# Allegro board STM32F103C8T6_KIT_DEV.brd
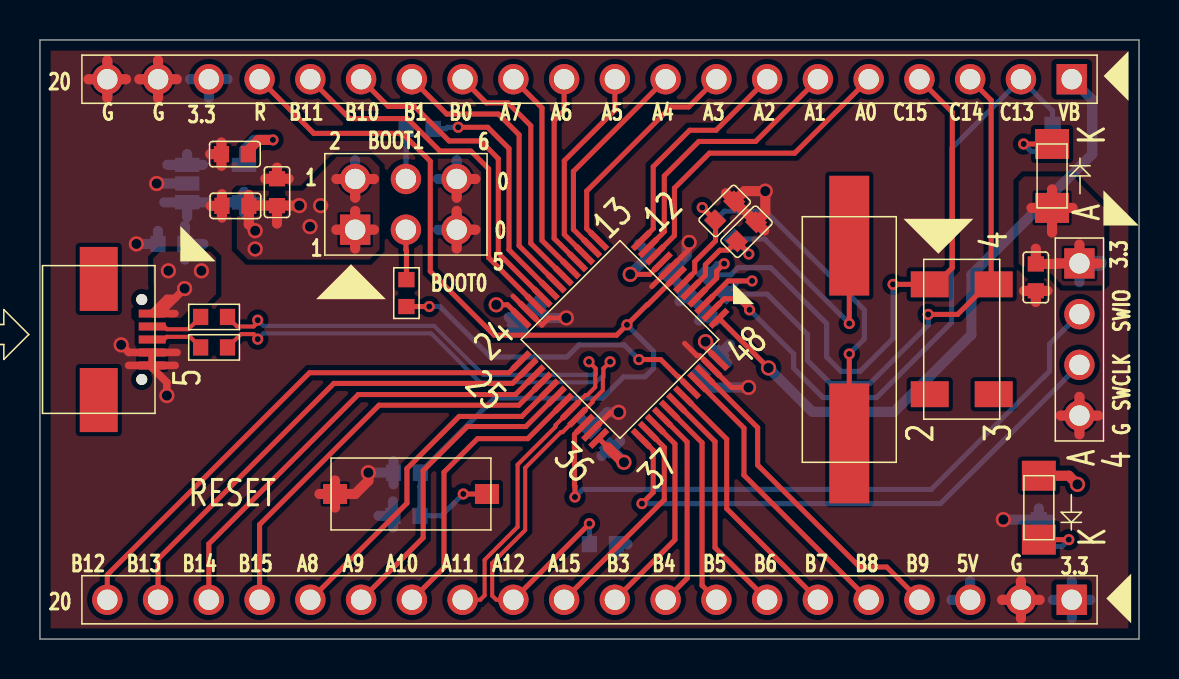
[diagram p0: board, top side]
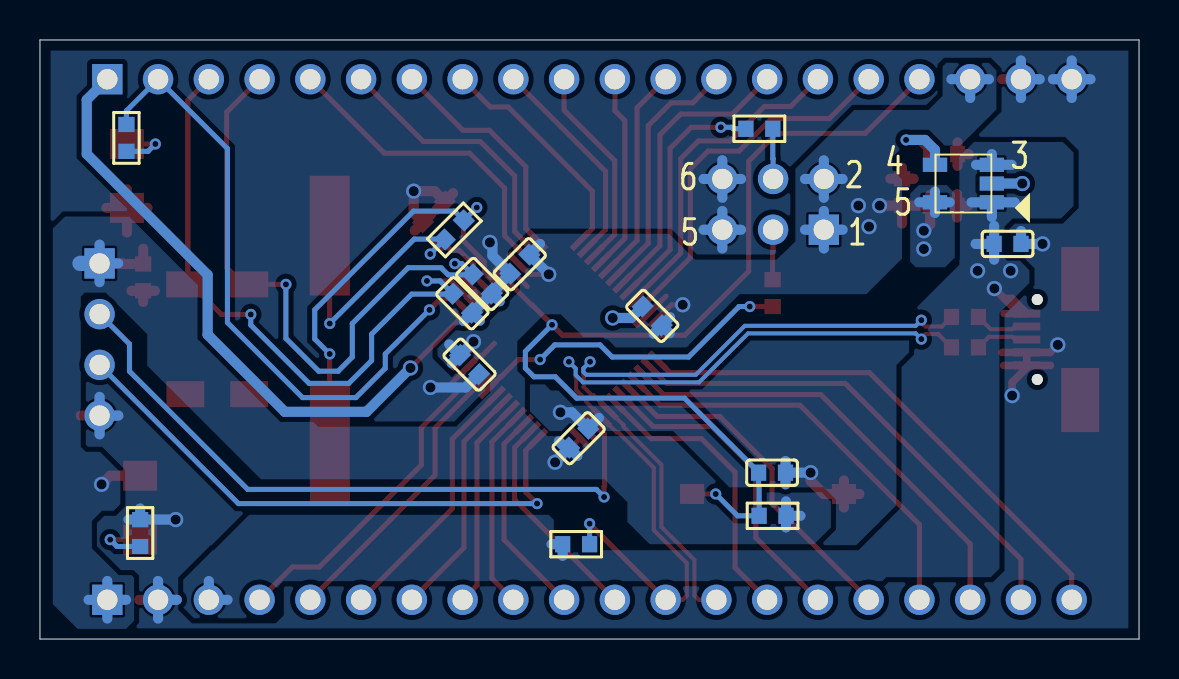
[diagram p1: board, bottom side, seen from below]

Outline 55 x 30 mm; copper layers: TOP, BOTTOM. Coordinates in mm from the lower left corner of the outline.
Outline path: 0,30 0,0 55,0 55,30 0,30

## Design rules (mm)
constraint set DEFAULT: min track width 0.127
net group USB_1: nets N07691 N07695
net group USB_2: nets PA11 PA12
net group PWR: nets VBAT
net group SIGNAL: nets BOOT0 BOOT1 N02981 N03013 N03359 N03363 N05848 OSCIN OSCOUT PA0 PA1 PA2 PA3 PA4 PA5 PA6 PA7 PA8 PA9 PA10 PA15 PB0 PB1 PB3 PB4 PB5 PB6 PB7 PB8 PB9 PB10 PB11 PB12 PB13 PB14 PB15 PC13 PC14 PC15 RESET SWCLK SWIO

## Placement (name value [footprint] x y rotation side)
C1  105  [C0603]  18.36 8.33 180 bottom
C2  104  [C0603]  49.83 18.11 270 top
C3  104  [C0603]  24.36 16.18 45 bottom
C4  104  [C0603]  30.99 18.77 315 bottom
C5  104  [C0603]  33.5 13.74 225 bottom
C6  104  [C0603]  28.04 10.06 135 bottom
C7  105  [C0603]  6.58 19.79 180 bottom
C8  106  [C0603]  9.78 21.69 180 top
C9  104  [C0603]  11.86 22.38 90 top
C10  223  [C0603]  9.75 24.28 180 top
C11  20p  [C0603]  32.87 17.78 45 bottom
C12  20p  [C0603]  33.86 16.81 45 bottom
C13  20p  [C0603]  35.36 20.4 225 top
C14  20p  [C0603]  34.26 21.44 225 top
D1  LED  [LED_1206_SMD_3_2X1_6MM]  49.99 6.58 90 top
D2  LED  [LED_1206_SMD_3_2X1_6MM]  50.65 23.19 270 top
J1  HEADER 3x2  [HEADER_3X2]  18.31 21.77 0 top
J2  HEADER 4x1  [HEADER_4X1]  52.02 15 0 top
J3  HEADER 20X1  [HEADER_20X1]  27.5 28.03 270 top
J4  HEADER 20X1  [HEADER_20X1]  27.5 1.97 270 top
NOREF  -  []  -81.69 -113.36 0 top
NOREF#2  -  []  55 0 90 top
NOREF#3  -  []  0 0 90 top
NOREF#4  -  []  55 32.54 90 top
NOREF#5  -  []  0 -10.16 90 top
NOREF#6  -  []  0 72.7 0 top
NOREF#7  -  []  0 30 0 top
R1  10K  [R0603]  18.34 6.17 0 bottom
R2  100K  [R0603]  18.34 17.32 90 top
R3  100K  [R0603]  19 25.55 0 bottom
R4  510R  [R0603]  49.99 5.31 90 bottom
R5  510R  [R0603]  50.67 25.1 90 bottom
R6  20R  [R0603]  8.71 16.13 0 top
R7  20R  [R0603]  8.71 14.61 0 top
R8  4.7K  [R0603]  28.17 4.75 0 bottom
R9  1M  [R0603]  34.26 20.49 135 bottom
SW1  SW PUSHBUTTON  [BUTTON_SMD_3X6MM]  18.57 7.26 0 top
U1  STM32F103xx  [LQFP48]  29.02 15 225 top
U2  RT9193  [SOT-23-5]  8.79 22.81 90 bottom
U3  USB-MICRO-2.0  [USB-MICRO-B-2_0]  2.94 15 270 top
Y1  32.768k  [MC306]  46.13 15.01 270 top
Y2  8MHz  [2PIN_SMD_HC49-S]  40.5 15 90 top

## Library data of the parts
C1-C14 = CAP NP
D1 D2 = LED
J1 = HEADER 3x2/SM
J2 = HEADER 4
J3 J4 = HEADER 20
R1-R9 = RESISTOR
SW1 = SW PUSHBUTTON
U1 = STM32F103xx_2
U2 = RT9193
U3 = USB-MICRO-2.0
Y1 Y2 = CRYSTAL

## Footprints (pads in the part's own frame, mm; a bottom-side part is the same pattern mirrored in y, then rotated)
2PIN_SMD_HC49-S
  rect 6x2 smd: 1(-5.2,0) 2(5.2,0)
BUTTON_SMD_3X6MM
  rect 1.2x1 smd: 1(-3.8,0) 2(3.8,0)
C0603
  rect 0.762x0.813 smd: 1(-0.673,0) 2(0.673,0)
HEADER_3X2
  rect 1.52x1.52 hole 1.02: 1(-2.54,-1.27)
  round 1.52 hole 1.02: 2(-2.54,1.27) 3(0,-1.27) 4(0,1.27) 5(2.54,-1.27) 6(2.54,1.27)
HEADER_4X1
  rect 1.52x1.52 hole 1.02: 1(0,3.81)
  round 1.52 hole 1.02: 2(0,1.27) 3(0,-1.27) 4(0,-3.81)
HEADER_20X1
  rect 1.52x1.52 hole 1.02: 1(0,24.13)
  round 1.52 hole 1.02: 2(0,21.59) 3(0,19.05) 4(0,16.51) 5(0,13.97) 6(0,11.43) 7(0,8.89) 8(0,6.35) 9(0,3.81) 10(0,1.27) 11(0,-1.27) 12(0,-3.81) 13(0,-6.35) 14(0,-8.89) 15(0,-11.43) 16(0,-13.97) 17(0,-16.51) 18(0,-19.05) 19(0,-21.59) 20(0,-24.13)
LED_1206_SMD_3_2X1_6MM
  rect 1.5x1.7 smd: 1(-1.6,0) 2(1.6,0)
LQFP48
  rect 1.2x0.3 smd: 1(-4.25,2.75) 2(-4.25,2.25) 3(-4.25,1.75) 4(-4.25,1.25) 5(-4.25,0.75) 6(-4.25,0.25) 7(-4.25,-0.25) 8(-4.25,-0.75) 9(-4.25,-1.25) 10(-4.25,-1.75) 11(-4.25,-2.25) 12(-4.25,-2.75) 25(4.25,-2.75) 26(4.25,-2.25) 27(4.25,-1.75) 28(4.25,-1.25) 29(4.25,-0.75) 30(4.25,-0.25) 31(4.25,0.25) 32(4.25,0.75) 33(4.25,1.25) 34(4.25,1.75) 35(4.25,2.25) 36(4.25,2.75)
  rect 0.3x1.2 smd: 13(-2.75,-4.25) 14(-2.25,-4.25) 15(-1.75,-4.25) 16(-1.25,-4.25) 17(-0.75,-4.25) 18(-0.25,-4.25) 19(0.25,-4.25) 20(0.75,-4.25) 21(1.25,-4.25) 22(1.75,-4.25) 23(2.25,-4.25) 24(2.75,-4.25) 37(2.75,4.25) 38(2.25,4.25) 39(1.75,4.25) 40(1.25,4.25) 41(0.75,4.25) 42(0.25,4.25) 43(-0.25,4.25) 44(-0.75,4.25) 45(-1.25,4.25) 46(-1.75,4.25) 47(-2.25,4.25) 48(-2.75,4.25)
MC306
  rect 1.3x1.9 smd: (2.75,1.6) (2.75,-1.6) 1(-2.75,-1.6) 2(-2.75,1.6)
R0603
  rect 0.762x0.813 smd: 1(-0.673,0) 2(0.673,0)
SOT-23-5
  rect 0.711x1.219 smd: 1(-0.94,-1.422) 2(0,-1.422) 3(0.94,-1.422) 4(0.94,1.422) 5(-0.94,1.422)
USB-MICRO-B-2_0
  rect 3.205x1.9 smd: (-3.033,0) (3.033,0)
  round 0.551 hole 0.55 unplated: (-2,2.15) (2,2.15)
  rect 0.4x1.35 smd: 1(-1.3,2.675) 2(-0.65,2.675) 3(0,2.675) 4(0.65,2.675) 5(1.3,2.675)

## Nets
5V: C7.1 J4.3 R8.2 U2.1 U2.3 U3.1(VBUS)
GND: C1.2 C2.2 C3.2 C4.2 C5.2 C6.2 C7.2 C8.2 C9.2 C10.2 C11.1 C12.1 C13.1 C14.1 J1.5 J1.6 J2.4 J3.19 J3.20 J4.2 R4.2 SW1.1 U1.8 U1.23 U1.35 U1.47(VSS_3) U2.2 U3.4 U3.5
VBAT: J3.1 U1.1
VCC3V3: C2.1 C3.1 C4.1 C5.1 C6.1 C8.1 C9.1 D1.2 D2.2 J1.1 J1.2 J2.1 J3.18 J4.1 R1.1 U1.9 U1.24 U1.36 U1.48 U2.5(VOUT)
BOOT0: R2.1 U1.44
BOOT1: R3.2 U1.20
OSCIN: C13.2 R9.1 U1.5 Y2.2
OSCOUT: C14.2 R9.2 U1.6 Y2.1
PA0: J3.5 U1.10
PA1: J3.6 U1.11
PA2: J3.7 U1.12
PA3: J3.8 U1.13
PA4: J3.9 U1.14
PA5: J3.10 U1.15
PA6: J3.11 U1.16
PA7: J3.12 U1.17
PA8: J4.16 U1.29
PA9: J4.15 U1.30
PA10: J4.14 U1.31
PA11: J4.13 R6.2 U1.32
PA12: J4.12 R7.2 R8.1 U1.33
PA15: J4.11 U1.38
PB0: J3.13 U1.18
PB1: J3.14 U1.19
PB3: J4.10 U1.39
PB4: J4.9 U1.40
PB5: J4.8 U1.41
PB6: J4.7 U1.42
PB7: J4.6 U1.43
PB8: J4.5 U1.45
PB9: J4.4 U1.46
PB10: J3.15 U1.21
PB11: J3.16 U1.22
PB12: J4.20 U1.25
PB13: J4.19 U1.26
PB14: J4.18 U1.27
PB15: J4.17 U1.28
PC13: J3.2 R5.2 U1.2
PC14: C12.2 J3.3 U1.3 Y1.2
PC15: C11.2 J3.4 U1.4 Y1.1
RESET: C1.1 J3.17 R1.2 SW1.2 U1.7
SWCLK: J2.3 U1.37
SWIO: J2.2 U1.34
N02981: J1.3 R2.2
N03013: J1.4 R3.1
N03359: D1.1(CATHODE) R4.1
N03363: D2.1(CATHODE) R5.1
N05848: C10.1 U2.4
N07691: R6.1 U3.2
N07695: R7.1 U3.3

## Via types
v1: diameter 0.559, hole 0.305, TOP to BOTTOM, 24 vias
v2: diameter 0.762, hole 0.508, TOP to BOTTOM, 25 vias

## Routing (per net, layer and track width the routed paths; a pad name or vN(x,y) marks a point on that pad's centre or on a via; arc(x,y) is an arc through that point)
5V: length 15.2
  TOP w0.381: v2(7.24,17.55) 6.75,17.06 ; 6.75,17.06 5.99,16.3 ; 6.75,17.06 6.36,17.06 5.62,16.31 U3.1 5.99,16.3 ; 5.99,16.3 6.75,16.3
  BOTTOM w0.508: 46.55,2.9 J4.3 45.61,1.97 ; 29.4,4.75 R8.2 28.84,4.17 ; C7.1 7.25,19 ; C7.1 8.18,19.79 ; C7.1 7.25,20.69 ; 7.37,23.75 8.15,23.75 ; 7.37,23.75 7.37,24.28 ; 7.37,23.75 6.38,23.75 ; U2.1 6.22,21.87 ; U2.1 7.37,21.13 ; U2.1 8.38,21.87
  vias: v2(6.43,18.44) v2(8.08,18.44)
GND: length 99.8
  TOP w0.254: 23.67,17.17 U1.23 25.12,15.72 25.48,16.08 v2(26.34,16.08) ; v2(32.49,19.86) 32.49,19.52 U1.8 30.62,17.65 ; U1.35 28.56,11.35 v2(28.96,11.35) ; v2(35.46,12.6) 34.61,12.6 U1.47 33.02,14.19 32.88,14.19 32.26,14.81
  TOP w0.381: U3.4 4.45,14.35 v2(4.06,14.73) ; U3.4 U3.5 ; U3.4 6.86,14.35 ; U3.5 5.62,13.59 6.35,12.85 v2(6.35,12.19) ; U3.5 4.44,13.7 ; U3.5 6.77,13.7
  TOP w0.508: J2.4 52.02,12.13 ; J2.4 52.95,11.19 ; J2.4 51.08,11.19 ; J2.4 52.02,10.25 ; 8.55,21.69 C8.2 ; C8.2 9.11,22.28 ; C8.2 9.11,21.11 ; C14.1 35.26,22.43 v2(36.3,22.43) 36.3,21.34 C13.1 ; C14.1 34.33,22.33 ; C14.1 35.15,21.5 ; 13.99,7.26 SW1.1 ; SW1.1 14.77,6.59 ; SW1.1 15.77,7.26 16.43,7.92 v2(16.43,8.33) ; SW1.1 14.77,7.94 ; 20.85,19.56 J1.5 ; J1.5 21.79,20.5 ; J1.5 20.85,21.44 ; 5.91,27.1 J3.19 ; J3.19 6.85,28.03 ; J3.19 4.97,28.03 ; J3.19 5.91,28.97 ; C10.2 9.08,24.87 ; C10.2 9.08,23.7 ; C10.2 8.52,24.28 ; J4.2 49.09,2.9 ; J4.2 49.09,1.03 ; J4.2 48.15,1.97 ; J4.2 50.03,1.97 ; C2.2 50.42,17.44 ; C2.2 49.25,17.44 ; C2.2 49.83,16.88 ; 21.79,23.04 J1.6 20.85,22.1 ; 2.43,28.03 J3.20 ; J3.20 3.37,27.1 ; J3.20 3.37,28.97 ; J3.20 4.31,28.03 ; 11.28,23.05 C9.2 ; C9.2 12.45,23.05 ; C9.2 11.86,23.61 ; C13.1 36.25,20.46 ; C13.1 35.42,21.29
  BOTTOM w0.508: 17.69,7.75 C1.2 ; C1.2 17.69,8.92 ; C1.2 v2(16.43,8.33) ; 49.09,1.03 J4.2 ; J4.2 48.15,1.97 ; J4.2 49.09,2.9 ; 31.98,17.72 C11.1 ; C11.1 32,16.91 ; C11.1 32.39,17.37 C4.2 32.36,19.19 32.36,19.74 v2(32.49,19.86) ; C11.1 33.36,16.34 C12.1 ; 52.02,10.25 J2.4 ; J2.4 51.08,11.19 ; J2.4 52.02,12.13 ; 4.97,28.03 J3.19 ; J3.19 5.91,27.1 ; J3.19 5.91,28.97 ; J3.20 4.31,28.03 ; J3.20 3.37,27.1 ; J3.20 2.43,28.03 ; J3.20 3.37,28.97 ; U2.2 v2(5.84,22.81) ; J1.5 21.79,20.5 ; J1.5 20.85,19.56 ; J1.5 19.92,20.5 ; J1.5 20.85,21.44 ; R4.2 49.99,6.54 ; R4.2 50.57,5.98 ; R4.2 v2(48.21,5.98) ; v2(4.83,19.79) C7.2 5.91,20.43 ; 20.85,22.1 J1.6 ; J1.6 20.85,23.98 ; J1.6 21.79,23.04 ; J1.6 19.92,23.04 ; C12.1 33.8,15.93 ; C12.1 32.99,15.94 ; C12.1 32.97,16.75 ; 27.03,11.07 C6.2 28.39,11.35 v2(28.96,11.35) ; v2(26.34,16.08) 25.41,16.08 C3.2 ; v2(35.46,12.6) 33.69,12.6 C5.2
VBAT: length 31.9
  TOP w0.254: v2(36.46,13.57) U1.1
  BOTTOM w0.508: v2(36.46,13.57) 38.66,11.38 42.75,11.38 46.61,15.24 46.61,18.24 52.66,24.29 52.66,27 J3.1
VCC3V3: length 60.4
  TOP w0.254: v2(33.31,14.89) 33.31,14.61 U1.48 ; v2(22.83,16.74) 23.4,16.74 U1.24 ; v2(29.54,18.26) 30.52,18.26 U1.9 ; U1.36 28.41,9.6
  TOP w0.508: 49.83,19.55 C2.1 50.85,18.78 50.88,18.81 J2.1 ; C9.1 11.86,20.8 ; C9.1 10.46,21.7 C8.1 ; C9.1 v2(12.98,21.7) ; 15.77,19.56 J1.1 ; J1.1 16.71,20.5 ; J1.1 14.84,20.5 ; J1.1 15.77,21.44 ; 49.62,21.59 D2.2 ; D2.2 51.68,21.59 ; D2.2 50.65,20.36 ; D2.2 50.65,22.52 ; J2.1 52.95,18.81 ; J2.1 52.02,19.75 ; 28.41,9.6 29.16,8.85 v2(29.22,8.85) ; C8.1 10.45,22.24 ; C8.1 10.45,20.76 v2(10.77,20.45) ; v2(51.92,7.75) 51.49,8.18 D1.2 ; 14.84,23.04 J1.2 ; J1.2 15.77,22.1 ; J1.2 16.71,23.04
  BOTTOM w0.508: J1.2 16.71,23.04 ; J1.2 14.84,23.04 ; J1.2 15.77,22.1 ; J1.2 15.77,23.98 ; 28.1,9.17 C6.1 ; C6.1 29.22,8.88 v2(29.22,8.85) ; C6.1 28.71,9.58 29.03,9.91 ; 51.63,1.03 J4.1 ; J4.1 52.57,1.97 ; J4.1 50.69,1.97 ; J4.1 51.63,2.9 ; U2.5 10.21,22.4 ; U2.5 10.21,21.34 ; U2.5 11,21.87 ; U2.5 9.47,21.87 ; J2.1 52.02,19.75 ; J2.1 52.02,17.87 ; J2.1 51.08,18.81 ; 23.49,15.31 C3.1 ; C3.1 23.47,16.12 ; C3.1 24.3,15.29 ; 8.45,27.1 J3.18 ; J3.18 7.51,28.03 ; J3.18 9.39,28.03 ; 16.94,6.17 R1.1 ; R1.1 17.67,6.9 ; R1.1 17.67,5.59 ; 15.77,19.56 J1.1 ; J1.1 15.77,21.44 ; J1.1 16.71,20.5 ; J1.1 14.84,20.5 ; C5.1 33.99,14.22 34.39,13.82 ; C5.1 v2(33.31,14.89) ; C5.1 34.52,14.76 ; v2(29.54,18.26) 29.54,18.27 C4.1 29.97,19.79
  BOTTOM w0.762: J2.1 53,18.81
  vias: v2(10.77,19.53) v2(13.51,20.65) v2(14.05,21.7)
BOOT0: length 16.4
  TOP w0.254: v1(29.97,14) 31.06,14 31.93,13.13 31.96,13.13 U1.44 ; v1(19.48,16.65) R2.1
  BOTTOM w0.254: v1(29.97,14) 29.24,14.73 26.97,14.73 26.37,14.12 22.54,14.12 20.02,16.65 v1(19.48,16.65)
BOOT1: length 12.2
  TOP w0.254: U1.20 23.47,19.49 23.47,24.56 22.4,25.63 v1(20.93,25.63)
  BOTTOM w0.254: v1(20.93,25.63) 20.4,25.63 20.32,25.55 R3.2
OSCIN: length 17.5
  TOP w0.254: U1.5 33.3,18.21 33.3,18.75 34.03,19.47 34.43,19.47 C13.2 35.47,19.33 v1(35.47,19.28) ; Y2.2 v1(40.5,15.8)
  BOTTOM w0.254: v1(40.5,15.8) 36.27,20.03 34.76,20.03 R9.1 v1(35.47,19.28)
OSCOUT: length 22.3
  TOP w0.254: Y2.1 v1(40.5,14.27) ; v1(33.14,21.61) C14.2 33.81,20.94 33.81,19.94 32.77,18.9 32.77,18.39 32.21,17.83 U1.6
  BOTTOM w0.254: v1(33.14,21.61) C14.2 34.26,21.43 36.31,21.43 41.25,16.48 41.25,15.02 v1(40.5,14.27)
PA0: length 15.7
  TOP w0.254: J3.5 37.77,24.33 33.5,24.33 31.75,22.58 31.75,20.2 U1.10
PA1: length 13.6
  TOP w0.254: U1.11 31.24,20.4 31.24,23.19 32.97,24.92 35.81,24.92 J3.6
PA2: length 11.5
  TOP w0.254: U1.12 30.69,20.55 30.69,23.65 32.51,25.48 33.83,25.48 J3.7
PA3: length 11.5
  TOP w0.254: U1.13 27.36,20.55 27.36,22.43 31.57,26.64 32.46,26.64 J3.8
PA4: length 10.7
  TOP w0.254: J3.9 26.7,23.42 26.7,20.51 U1.14
PA5: length 10.3
  TOP w0.254: J3.10 28.77,26.48 26.24,23.95 26.24,20.26 U1.15
PA6: length 9.8
  TOP w0.254: J3.11 26.23,26.46 25.73,25.96 25.73,20.06 U1.16
PA7: length 10.7
  TOP w0.254: U1.17 25.12,19.96 25.12,26.6 J3.12
PA8: length 17.3
  TOP w0.254: J4.16 18.36,6.8 18.36,8.53 20.98,11.15 24.11,11.15 U1.29
PA9: length 16
  TOP w0.254: U1.30 24.31,10.64 21.39,10.64 19.18,8.43 19.18,5.07 J4.15
PA10: length 14.5
  TOP w0.254: U1.31 24.41,10.03 21.89,10.03 20.22,8.36 20.22,3.58 J4.14
PA11: length 36
  TOP w0.203: R6.2 9.86,15.65 10.69,15.65 10.9,15.86 v1(10.9,15.97) ; J4.13 22.03,1.97 22.25,2.18 22.25,3.96 23.9,5.61 23.9,8.73 25.8,10.63 25.8,10.71 U1.32 27.3,12.22 27.38,12.22 27.79,12.62 27.79,13.24 27.81,13.26 27.81,13.55 v1(27.47,13.89)
  BOTTOM w0.203: v1(27.47,13.89) 27.81,13.55 27.81,13.38 27.66,13.23 22.18,13.23 19.73,15.68 11.18,15.68 v1(10.9,15.97)
PA12: length 43.1
  TOP w0.203: R7.2 10.05,15.27 10.69,15.27 10.9,15.07 v1(10.9,15.02) ; v1(28.53,13.89) 28.19,13.55 28.19,13.1 28.17,13.08 28.17,12.46 27.65,11.95 27.65,11.86 U1.33 26.15,10.36 26.07,10.36 24.28,8.57 24.28,5.46 22.63,3.8 22.63,2.17 22.83,1.97 J4.12
  TOP w0.254: J4.12 27.5,5.77 v1(27.5,5.78)
  BOTTOM w0.203: v1(10.9,15.02) 11.18,15.3 19.57,15.3 22.02,12.85 27.82,12.85 28.19,13.23 28.19,13.55 v1(28.53,13.89)
  BOTTOM w0.254: R8.1 v1(27.5,5.78)
PA15: length 10.8
  TOP w0.254: J4.11 31.24,6.98 31.24,9.6 U1.38
PB0: length 12.6
  TOP w0.254: U1.18 24.56,19.82 24.56,25.7 23.42,26.85 22.34,26.85 J3.13
PB1: length 14.7
  TOP w0.254: J3.14 20.35,26.29 22.94,26.29 23.98,25.25 23.98,19.69 U1.19
PB3: length 10.4
  TOP w0.254: U1.39 31.78,9.77 31.78,4.97 J4.10
PB4: length 10.1
  TOP w0.254: J4.9 32.38,3.04 32.38,9.87 U1.40
PB5: length 10.5
  TOP w0.254: U1.41 33.13,9.83 33.13,2.68 J4.8
PB6: length 11.7
  TOP w0.254: J4.7 33.78,4.57 33.78,9.89 U1.42
PB7: length 13
  TOP w0.254: U1.43 34.37,10.01 34.37,6.53 J4.6
PB8: length 14.5
  TOP w0.254: J4.5 35.23,8.21 35.23,10.56 U1.45
PB9: length 16.5
  TOP w0.254: U1.46 35.92,10.58 35.92,8.71 41.02,3.61 42.37,3.61 J4.4
PB10: length 16.4
  TOP w0.254: J3.15 17.43,26.67 18.75,26.67 20.47,24.94 22.05,24.94 22.94,24.05 22.94,19.32 U1.21
PB11: length 18.5
  TOP w0.254: J3.16 15.5,26.06 18.39,26.06 20.02,24.43 21.56,24.43 22.45,23.55 22.45,19.1 U1.22
PB12: length 26.4
  TOP w0.254: J4.20 3.37,3.22 13.49,13.34 23.47,13.34 U1.25
PB13: length 24.5
  TOP w0.254: J4.19 5.91,4 14.71,12.8 23.64,12.8 U1.26
PB14: length 22.6
  TOP w0.254: U1.27 23.79,12.24 15.93,12.24 8.45,4.77 J4.18
PB15: length 20.9
  TOP w0.254: J4.17 10.99,5.73 16.97,11.71 23.97,11.71 U1.28
PC13: length 32.8
  TOP w0.254: U1.2 34.25,17.04 34.95,17.04 v1(35.51,16.48)
  BOTTOM w0.254: R5.2 50.67,26.45 J3.2 45.62,24.56 45.62,15.85 41.86,12.09 39.19,12.09 37.72,13.56 37.72,14.27 v1(35.51,16.48)
PC14: length 33.6
  TOP w0.254: J3.3 47.6,26.98 47.6,17.93 47.43,17.76 ; 47.43,17.76 45.92,16.26 v1(44.45,16.26) ; 47.43,17.76 Y1.2 ; U1.3 34.43,17.93 v1(35.64,17.93)
  BOTTOM w0.254: v1(35.64,17.93) 34.98,17.93 C12.2 34.35,17.27 36.4,17.27 38.4,15.27 38.4,13.94 39.55,12.8 41.53,12.8 44.45,15.72 v1(44.45,16.26)
PC15: length 32.8
  TOP w0.254: v1(42.69,17.76) Y1.1 44.83,17.76 45.66,18.59 45.66,26.39 J3.4 ; U1.4 33.86,18.07 33.86,18.42 v1(34.24,18.8)
  BOTTOM w0.254: v1(42.69,17.76) 42.69,15.06 41.05,13.41 40.08,13.41 39.37,14.12 39.37,15.8 36.58,18.59 34.93,18.59 34.57,18.24 33.36,18.24 C11.2 33.88,18.8 v1(34.24,18.8)
RESET: length 53.2
  TOP w0.254: SW1.2 v1(21.18,7.26) ; J3.17 13.7,25.32 18.14,25.32 19.53,23.93 19.53,18.41 22.73,15.21 28.85,15.21 v1(29.38,15.74) 30.37,16.73 30.41,16.73 U1.7
  BOTTOM w0.254: v1(21.18,7.26) 20.09,6.17 R1.2 19.01,7.65 19.04,7.67 C1.1 19.04,8.36 22.75,12.06 28.14,12.06 29.21,13.13 30.28,13.13 30.71,13.56 30.71,14.4 v1(29.38,15.74)
SWCLK: length 28.5
  TOP w0.254: U1.37 30.69,9.45 30.69,7.35 v1(30.12,6.78)
  BOTTOM w0.254: v1(30.12,6.78) 45.07,6.78 J2.3
SWIO: length 33.7
  TOP w0.254: U1.34 26.75,10.25 26.75,7.67 26.77,7.65 v1(26.77,7.11)
  BOTTOM w0.254: v1(26.77,7.11) 27.15,7.49 44.6,7.49 50.52,13.41 50.52,14.77 J2.2
N02981: length 2.5
  TOP w0.254: R2.2 18.34,19.46 18.31,19.48 J1.3
N03013: length 2.5
  BOTTOM w0.254: R3.1 18.33,24.06 18.31,24.05 J1.4
N03359: length 3.1
  TOP w0.254: D1.1 v1(51.49,4.98)
  BOTTOM w0.254: v1(51.49,4.98) 51.14,4.64 R4.1
N03363: length 3
  TOP w0.254: D2.1 v1(49.23,24.79)
  BOTTOM w0.254: R5.1 49.59,24.42 v1(49.23,24.79)
N05848: length 4
  TOP w0.508: v1(11.66,24.99) 10.93,24.99 10.43,24.49 C10.1
  BOTTOM w0.508: 10.21,23.75 10.21,24.49 10.72,24.99 v1(11.66,24.99)
N07691: length 2.7
  TOP w0.203: R6.1 7.43,15.52 6.35,15.52 6.22,15.65 U3.2
N07695: length 2.7
  TOP w0.203: U3.3 6.21,15 6.35,15.13 7.51,15.13 R7.1

## Copper pours and planes (outline as drawn; the poured copper is in the pictures)
5V on TOP: 4.88,16.48 5.49,16.48 5.69,16.69 5.69,17.75 5.66,17.78 5.66,19.05 6.02,19.41 8.51,19.41 8.81,19.1 8.81,17.27 8.36,16.81 7.8,16.81 7.06,16.08 4.93,16.08 4.83,16.18 4.83,16.43
5V on BOTTOM: 3.28,21.69 3.91,21.06 6.32,21.06 6.73,20.65 6.73,19.08 6.6,18.95 5.97,18.95 5.49,18.47 5.49,17.83 6.99,16.33 6.99,3.53 7.42,3.1 12.65,3.1 12.85,2.9 42.82,2.9 43.05,2.67 43.05,1.3 43.31,1.04 47.29,1.04 47.83,1.57 47.83,2.97 46.35,4.45 46.3,4.45 44.53,6.22 29.54,6.22 29.29,5.97 29.29,4.72 29.01,4.45 14.05,4.45 11.89,6.6 11.89,13.61 11.25,14.25 11.25,16.48 8.99,18.74 8.99,24.16 8.26,24.89 3.81,24.89 3.28,24.36
GND on TOP: 54.47,0.53 0.53,0.53 0.53,29.47 54.47,29.47 ; 4 cut-outs
GND on BOTTOM: 54.47,0.53 0.53,0.53 0.53,29.47 54.47,29.47 ; 16 cut-outs
VCC3V3 on TOP: 9.86,22.38 9.86,19.56 10.41,19 16.48,19 16.99,19.51 16.99,23.65 16.48,24.16 14.86,24.16 13.16,22.45 9.93,22.45
VCC3V3 on TOP: 48.97,22.89 48.97,18.82 49.48,18.31 50.57,18.31 51.18,17.7 53.14,17.7 53.26,17.83 53.26,21.59 51.69,23.16 49.25,23.16
VCC3V3 on BOTTOM: 50.7,0.51 50.29,0.91 50.29,3.07 50.42,3.2 51.05,3.2 52.4,4.55 52.4,5.92 51.89,6.43 51.31,6.43 50.98,6.76 50.98,8.36 51.99,9.37 52.7,9.37 52.96,9.63 52.96,17.14 52.76,17.35 51.71,17.35 49.63,15.27 49.63,13.69 43.94,8 26.75,8 25.6,6.86 25.6,5.87 24.49,4.75 16.26,4.75 15.42,5.59 15.42,6.88 15.88,7.34 20.6,7.34 23.42,10.16 27.43,10.16 27.81,10.54 28.42,10.54 28.8,10.16 29.59,10.16 30.73,11.3 30.73,13.08 31.11,13.46 31.11,14.91 29.77,16.26 28.93,16.26 27.69,15.01 26.59,15.01 26.19,14.61 22.63,14.61 22.53,14.71 22.53,14.73 19.99,17.27 13.64,17.27 11.86,19.05 11.86,23.01 12.34,23.5 12.34,24.13 11.76,24.71 8.94,24.71 7.14,26.52 7.14,28.47 7.52,28.85 9.65,28.85 9.83,28.68 9.83,27.2 10.54,26.49 14.25,26.49 17.2,23.55 17.2,19.91 17.86,19.25 17.88,19.25 18.14,19 22.23,19 23.52,20.29 30.35,20.29 31.32,19.33 31.32,19.05 30.99,18.72 30.99,17.45 32.98,15.46 34.2,15.46 35.1,14.55 35.1,14.17 34.39,13.46 34.32,13.54 33.15,13.54 32.46,12.85 32.46,12.34 34.16,10.64 41.1,10.64 47.12,16.66 47.12,17.73 50.55,21.16 53.75,21.16 54.36,20.55 54.36,1.75 53.11,0.51 ; 2 cut-outs
VCC3V3 on BOTTOM: 9.22,22.33 9.22,19.1 9.7,18.62 11.18,18.62 11.46,18.9 11.46,22.3 11.02,22.73 9.63,22.73

## Text on the board
Ref Des/Silkscreen Top: B12 | G | B13 | B14 | 3.3 | B15 | R | B11 | A8 | 1 | A9 | B10 | BOOT1 | A10 | B1 | BOOT0 | A11 | B0 | A12 | 0 | A7 | A15 | A6 | A5 | B3 | A4 | B4 | A3 | B5 | A2 | B6 | A1 | B7 | A0 | B8 | C15 | B9 | C14 | 5V | C13 | VB | SWIO | SWCLK | RESET
XSECTION_CHART: 1-2 | *  DIELECTRIC - 30 MIL | L2 BOTTOM CONDUCTOR - 1OZ_COPPER 1.4 MIL | L1 TOP CONDUCTOR - 1OZ_COPPER 1.4 MIL | DESIGN CROSS SECTION CHART | ___________________________ | TOTAL THICKNESS 32.8 MIL
PAGE_OUTLINE: N.N.T
User.5: THICKNESS: SEE DATAIL A | SILKSCREEN: WHITE | SOLDER MASK: GREEN | LAYER: 2 | *****NOTE***** | DETAIL: A
User.6: FIGURE | FINISHED_SIZE | 12.0 | 20.0 | 40.157 | 21.654 | DRILL CHART: TOP to BOTTOM | ALL UNITS ARE IN MILS | TOLERANCE_DRILL | +3.0/-3.0 | PLATED | NON-PLATED | QTY | 24 | 25 | 50 | 2
